# Altium PCB RX_Banda_Aerea.PcbDoc
Units mm, origin at the board's own origin, x right, y up, seen from the top; angles counter-clockwise.
Board outline 80 x 56.52 mm, 2 copper layers (Top Layer, Bottom Layer); 132 components, 71 nets, 312 pads, 9 vias.
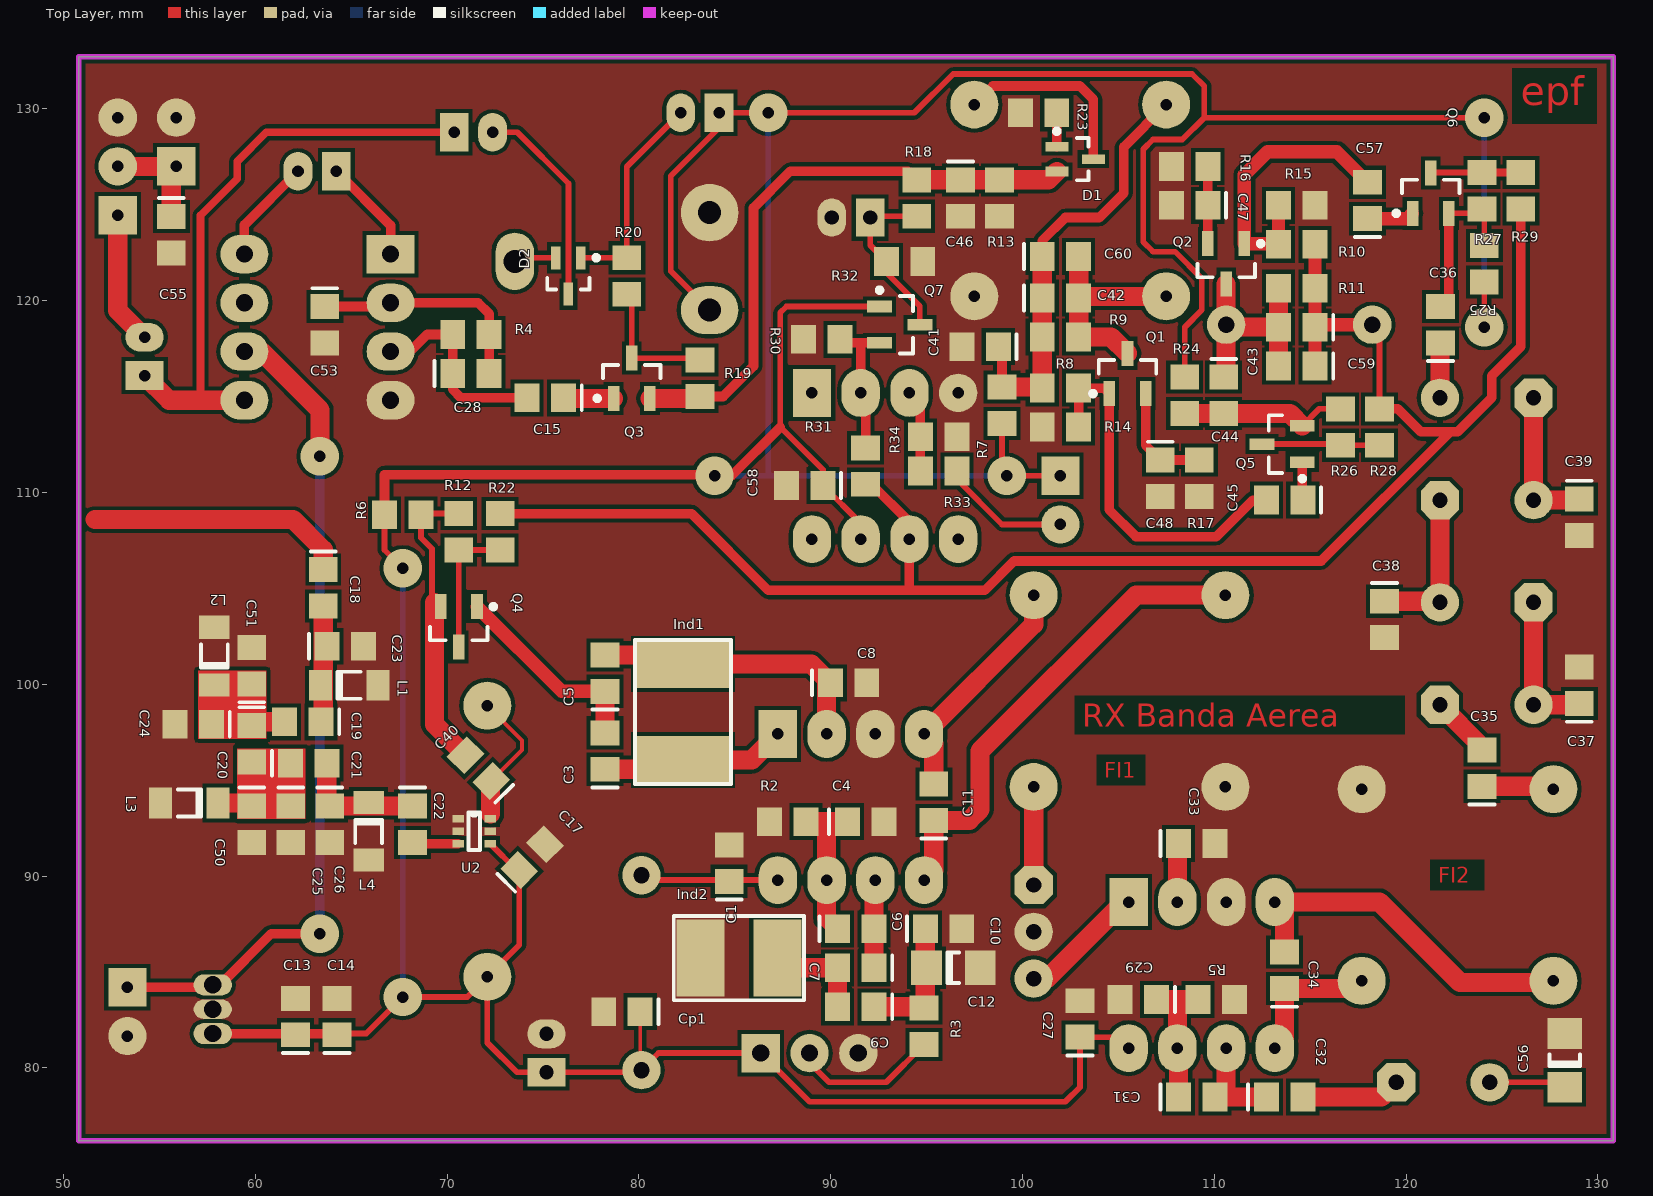
[diagram p0: Top Layer view]
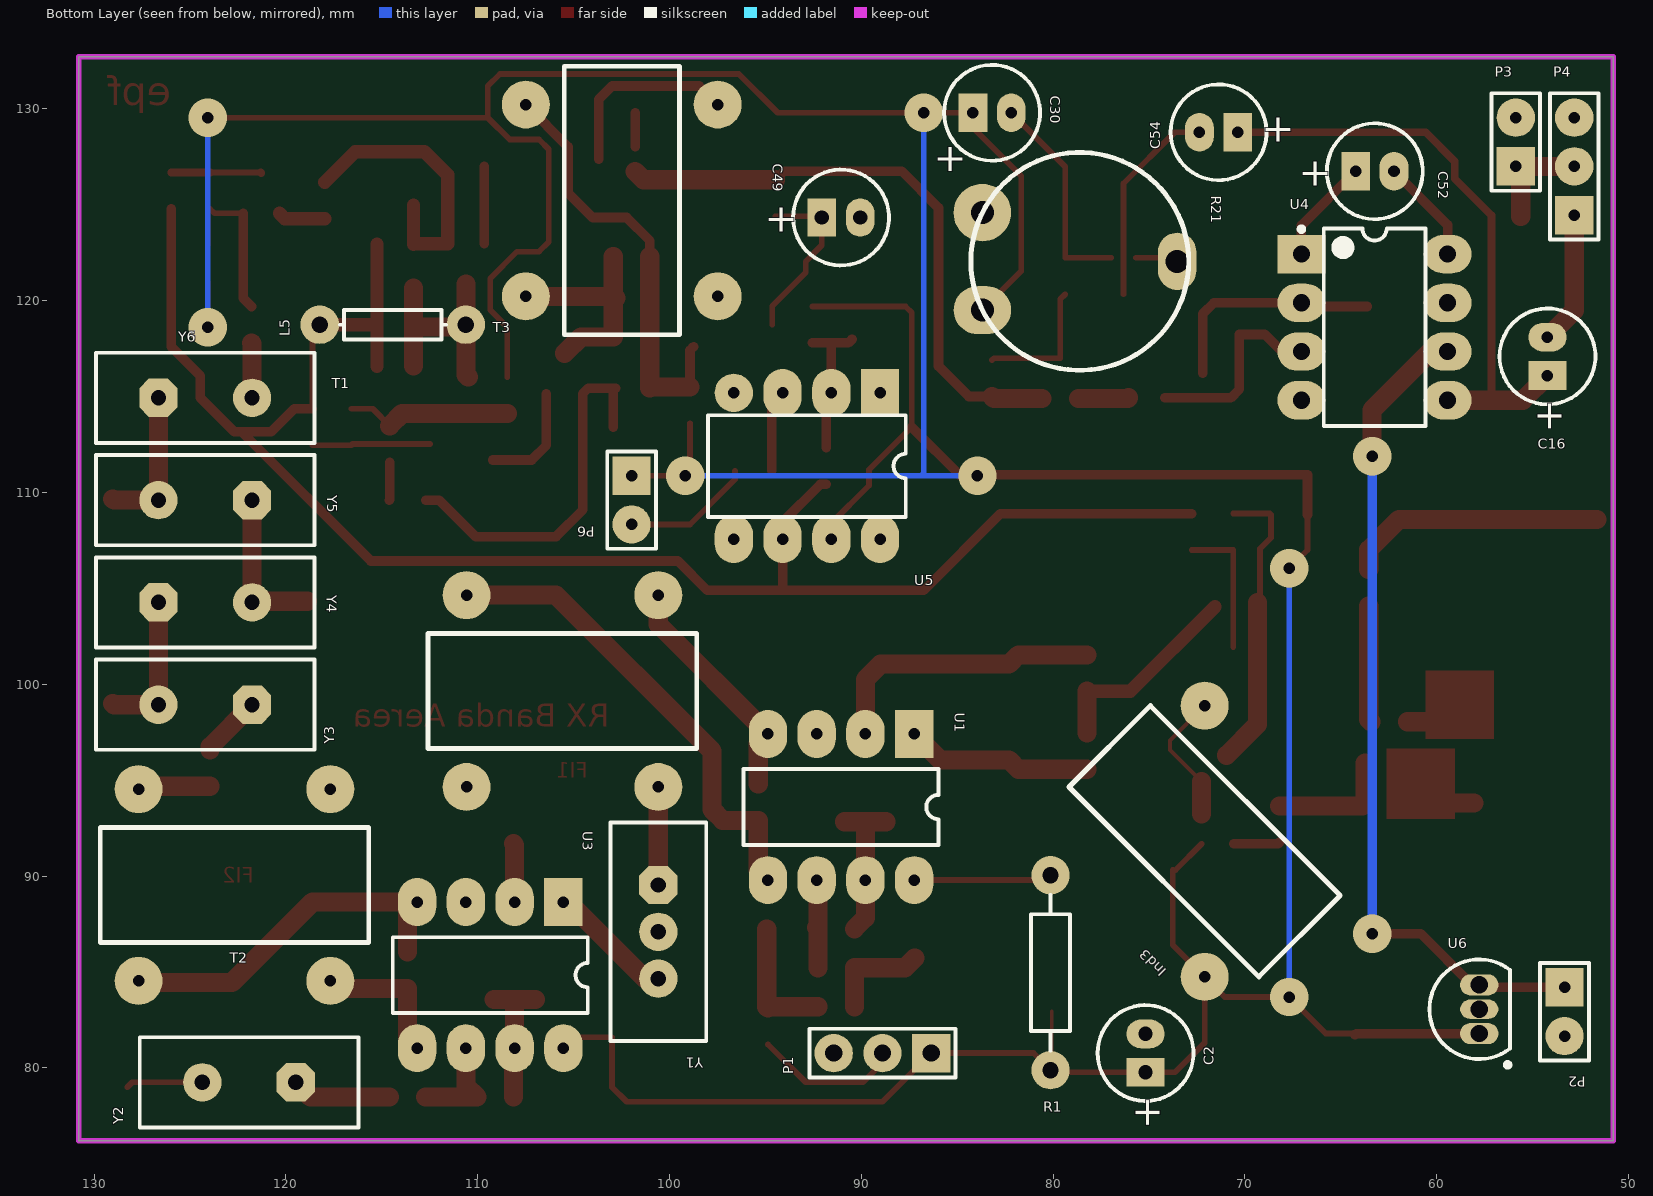
[diagram p1: Bottom Layer view, seen from below]

## Layer stack, top to bottom
Top Layer: signal copper 0.0356
Dielectric: dielectric 0.32, FR-4, Dk 4.8
Bottom Layer: signal copper 0.0356

## Board outline
50.8,76.2 130.8,76.2 130.8,132.715 50.8,132.715

## Design rules (kind name [scope] priority, off if disabled: settings)
Clearance [All] p1: gap=0.2
MinimumSolderMaskSliver [All] p1: minsoldermaskwidth=0
PolygonConnect [All] p1: connectstyle=Direct reliefconductorwidth=0.254 reliefentries=4 polygonreliefangle="90 Angle"
RoomDefinition Ampli_audio [InComponentClass('Ampli_audio')] p1: confinementstyle=ConfineIn formatcopy=TRUE lockcomponents=TRUE outline 50.8,111.506 86.741,111.506 86.741,132.08 50.8,132.08
RoomDefinition Mezclador2 [InComponentClass('Mezclador2')] p2: confinementstyle=ConfineIn formatcopy=TRUE lockcomponents=TRUE outline 133.096,127.762 88.265,127.762 88.265,74.803 133.096,74.803
RoomDefinition Mezclador1 [InComponentClass('Mezclador1')] p3: confinementstyle=ConfineIn formatcopy=TRUE lockcomponents=FALSE outline 64.643,76.708 125.984,76.708 125.984,114.427 64.643,114.427
RoomDefinition FiltroRF [InComponentClass('FiltroRF')] p4: confinementstyle=ConfineIn formatcopy=TRUE lockcomponents=TRUE outline 52.959,107.315 52.959,89.027 70.485,89.027 70.485,107.315
RoomDefinition Ampli_RF [InComponentClass('Ampli_RF')] p5: confinementstyle=ConfineIn formatcopy=TRUE lockcomponents=TRUE outline 71.653,81.915 83.058,93.32 73.449,102.929 62.044,91.524
RoomDefinition Ampli_FI2 [InComponentClass('Ampli_FI2')] p6: confinementstyle=ConfineIn formatcopy=TRUE lockcomponents=TRUE outline 128.016,133.35 83.693,133.35 83.693,96.266 128.016,96.266
RoomDefinition Alimentacion [InComponentClass('Alimentacion')] p7: confinementstyle=ConfineIn formatcopy=TRUE lockcomponents=TRUE outline 51.816,76.962 65.278,76.962 65.278,86.36 51.816,86.36
RoutingVias [All] p1: holewidth=0.6 width=2 viastyle="Through Hole" minholewidth=0.5 minwidth=1 maxholewidth=1 maxwidth=3
SilkscreenOverComponentPads [All] p1: minsilkscreentomaskgap=0
SolderMaskExpansion [All] p1: expansion=0.1
TestPointUsage [All] p1: valid=0 allowmultiple=FALSE
Testpoint [All] p1: side=15 testpointundercomponent=TRUE minsize=1.016 maxsize=2.54 preferedsize=1.524 minholesize=0 maxholesize=1.016 preferedholesize=0.813 testpointgrid=0.025 style=1023 order=0123456789
Width [All] p1: maxlimit=3 minlimit=0.2 preferedwidth=1
22 further rules are at their usual default settings.

## Classes and differential pairs
component class Mezclador2: C27 C29 C31 C32 C33 C34 C35 C36 C37 C38 C39 C56 R5 T2 U3 Y2 Y3 Y4 Y5 Y6
component class Mezclador1: C1 C2 C3 C4 C5 C6 C7 C8 C9 C10 C11 C12 C40 Cp1 Ind1 Ind2 P1 Q4 R1 R2 R3 R6 R12 R22 T1 U1 Y1
component class FiltroRF: C18 C19 C20 C21 C22 C23 C24 C25 C26 C50 C51 L1 L2 L3 L4
component class Ampli_RF: C17 Ind3 U2
component class Alimentacion: C13 C14 P2 U6
component class Ampli_audio: C15 C16 C28 C30 C52 C53 C54 C55 D2 P3 P4 Q3 R4 R19 R20 R21 U4
component class Ampli_FI2: C41 C42 C43 C44 C45 C46 C47 C48 C49 C57 C58 C59 C60 D1 L5 P6 Q1 Q2 Q5 Q6 Q7 R7 R8 R9 R10 R11 R13 R14 R15 R16 R17 R18 R23 R24 R25 R26 R27 R28 R29 R30 R31 R32 R33 R34 T3 U5

## Components (designator, comment, footprint, x,y, rotation, side; value= is the part's Value field where it differs from the comment)
C1 "Cap Pol3" C0805 84.709,90.678 r90 top
C2 "Cap Pol1" B#1 75.184,80.772 r90 bottom
C3 "Cap Pol3" C0805 78.232,96.52 r90 top
C4 "Cap Pol3" C0805 91.821,92.837 r0 top
C5 "Cap Pol3" C0805 78.232,100.584 r90 top
C6 "Cap Pol3" C0805 91.313,87.249 r0 top
C7 "Cap Pol3" C0805 91.313,85.217 r180 top
C8 "Cap Pol3" C0805 90.932,100.076 r0 top
C9 "Cap Pol3" C0805 91.313,83.185 r180 top
C10 "Cap Pol3" C0805 95.885,87.249 r0 top
C11 "Cap Pol3" C0805 95.377,93.853 r90 top
C12 "Cap Semi" C1206 96.393,85.217 r0 top
C13 "Cap Pol3" C0805 62.103,82.677 r90 top
C14 "Cap Pol3" C0805 64.262,82.677 r90 top
C15 "Cap Pol3" C0805 75.123,114.935 r180 top
C16 "Cap Pol1" B#2 54.229,117.094 r90 bottom
C17 "Cap Pol3" C0805 74.437,90.985 r45 top
C18 "Cap Pol3" C0805 63.547,105.029 r270 top
C19 "Cap Pol3" C0805 62.484,98.044 r180 top
C20 "Cap Pol3" C0805 59.817,96.901 r270 top
C21 "Cap Pol3" C0805 62.782,95.885 r0 top
C22 "Cap Pol3" C0805 68.199,92.71 r270 top
C23 "Cap Pol3" C0805 64.695,101.981 r0 top
C24 "Cap Pol3" C0805 56.769,97.917 r180 top
C25 "Cap Pol3" C0805 61.849,92.71 r270 top
C26 "Cap Pol3" C0805 63.881,92.71 r270 top
C27 "Cap Pol3" C0805 102.997,82.55 r90 top
C28 "Cap Pol3" C0805 71.247,116.205 r0 top
C29 "Cap Pol3" C0805 106.045,83.566 r180 top
C30 "Cap Pol1" B#2 83.185,129.794 r180 bottom
C31 "Cap Pol3" C0805 109.093,78.486 r0 top
C32 "Cap Pol3" C0805 113.665,78.486 r0 top
C33 "Cap Pol3" C0805 109.093,91.694 r0 top
C34 "Cap Pol3" C0805 113.665,85.09 r90 top
C35 "Cap Pol3" C0805 123.952,95.631 r90 top
C36 "Cap Pol3" C0805 121.793,118.745 r90 top
C37 "Cap Pol3" C0805 129.032,99.949 r90 top
C38 "Cap Pol3" C0805 118.872,103.378 r270 top
C39 "Cap Pol3" C0805 129.032,108.712 r270 top
C40 "Cap Pol3" C0805 71.628,95.631 r135 top
C41 "Cap Pol3" C0805 97.79,117.602 r180 top
C42 "Cap Pol3" C0805 101.981,120.142 r0 top
C43 "Cap Pol3" C0805 114.3,118.618 r180 top
C44 "Cap Pol3" C0805 110.49,115.062 r270 top
C45 "Cap Pol3" C0805 113.665,109.601 r180 top
C46 "Cap Pol3" C0805 96.774,125.349 r270 top
C47 "Cap Pol3" C0805 108.712,124.968 r180 top
C48 "Cap Pol3" C0805 107.188,110.744 r270 top
C49 "Cap Pol1" B#1 91.059,124.333 r180 bottom
C50 "Cap Pol3" C0805 59.817,92.71 r270 top
C51 "Cap Pol3" C0805 59.817,100.965 r90 top
C52 "Cap Pol1" B#2 63.23,126.746 r180 bottom
C53 "Cap Pol3" C0805 63.627,118.745 r270 top
C54 "Cap Pol1" B#2 71.374,128.778 r0 bottom
C55 "Cap Pol3" C0805 55.626,123.444 r270 top
C56 "Cap Semi" C1206 128.27,80.391 r90 top
C57 "Cap Pol3" C0805 117.983,125.222 r90 top
C58 "Cap Pol3" C0805 88.646,110.363 r180 top
C59 "Cap Pol3" C0805 114.3,116.586 r180 top
C60 "Cap Pol3" C0805 101.981,122.301 r0 top
Cp1 "Cap Pol3" C0805 79.121,82.931 r180 top
D1 "BAS70-04W" SOT323_N 102.743,127.381 r0 top
D2 "BAS70-04W" SOT323_N 76.327,121.285 r270 top
Ind1 "Ind2" Ind_5mm 82.296,98.552 r270 top
Ind2 "Ind2" Ind_4mm 85.217,85.725 r0 top
Ind3 "Ind2" NTH12_2 72.102,91.817 r45 bottom
L1 "Inductor" 3261 64.897,99.949 r0 top
L2 "Inductor" 3261 57.867,101.473 r90 top
L3 "Inductor" 3261 56.567,93.808 r180 top
L4 "Inductor" 3261 65.913,92.329 r270 top
L5 "Res1" AXIAL-0.3 114.427,118.745 r0 bottom
P1 "Header 3" HDR1X3#1 86.36,80.772 r0 bottom
P2 "Header 2" HDR1X2 53.34,84.201 r270 bottom
P3 "Header 2" HDR1X2 55.88,127 r90 bottom
P4 "Header 3" HDR1X3#2 52.832,124.46 r90 bottom
P6 "Header 2" HDR1X2 101.981,110.871 r270 bottom
Q1 "BFS17" SOT23_N 105.476,116.205 r90 top
Q2 "BFS17" SOT23_N 110.617,121.92 r270 top
Q3 "PMBF4391" SOT23_N 79.629,115.951 r90 top
Q4 "PMBF4391" SOT23_N 70.612,102.997 r270 top
Q5 "PMBF4391" SOT23_N 113.538,112.522 r180 top
Q6 "PMBF4391" SOT23_N 121.285,125.603 r90 top
Q7 "PMBF4391" SOT23_N 93.599,118.745 r0 top
R1 "Res2" AXIAL-0.4 80.137,84.963 r270 bottom
R2 "Res Semi" 2012[0805] 87.757,92.837 r0 top
R3 "Res Semi" 2012[0805] 94.869,82.169 r90 top
R4 "Res Semi" 2012[0805] 71.247,118.237 r180 top
R5 "Res Semi" 2012[0805] 110.109,83.566 r180 top
R6 "Res Semi" 2012[0805] 67.691,108.839 r180 top
R7 "Res Semi" 2012[0805] 98.933,114.554 r270 top
R8 "Res Semi" 2012[0805] 101.981,115.443 r0 top
R9 "Res Semi" 2012[0805] 101.981,118.11 r0 top
R10 "Res Semi" 2012[0805] 114.3,122.936 r0 top
R11 "Res Semi" 2012[0805] 114.3,120.65 r0 top
R12 "Res Semi" 2012[0805] 70.612,107.95 r270 top
R13 "Res Semi" 2012[0805] 98.806,125.349 r90 top
R14 "Res Semi" 2012[0805] 101.981,113.411 r180 top
R15 "Res Semi" 2012[0805] 114.3,124.968 r180 top
R16 "Res Semi" 2012[0805] 108.712,127 r0 top
R17 "Res Semi" 2012[0805] 109.22,110.744 r270 top
R18 "Res Semi" 2012[0805] 94.488,125.349 r270 top
R19 "Res Semi" 2012[0805] 83.185,115.951 r90 top
R20 "Res Semi" 2012[0805] 79.375,121.285 r90 top
R21 "Pot" Potenciometro 78.613,122.047 r270 bottom
R22 "Res Semi" 2012[0805] 72.771,107.95 r90 top
R23 "Res Semi" 2012[0805] 100.838,129.794 r0 top
R24 "Res Semi" 2012[0805] 108.458,115.062 r90 top
R25 "Res Semi" 2012[0805] 124.079,121.92 r90 top
R26 "Res Semi" 2012[0805] 116.586,113.411 r270 top
R27 "Res Semi" 2012[0805] 123.952,125.73 r90 top
R28 "Res Semi" 2012[0805] 118.618,113.411 r90 top
R29 "Res Semi" 2012[0805] 125.984,125.73 r270 top
R30 "Res Semi" 2012[0805] 89.535,117.983 r0 top
R31 "Res Semi" 2012[0805] 91.821,111.379 r270 top
R32 "Res Semi" 2012[0805] 93.853,122.047 r0 top
R33 "Res Semi" 2012[0805] 95.631,111.125 r180 top
R34 "Res Semi" 2012[0805] 95.631,112.903 r0 top
T1 "Toroide" NTH12_4 105.584,99.648 r180 bottom
T2 "Toroide" NTH12_4 122.682,89.535 r0 bottom
T3 "Toroide" NTH12_4 102.489,125.222 r90 bottom
U1 "SA602" SA602 87.249,97.409 r270 bottom
U2 "uPC2710TB" UPC2710TB2 70.575,92.982 r0 top
U3 "SA602" SA602 105.537,88.646 r270 bottom
U4 "LM386N-1" N08E 63.246,118.618 r180 bottom
U5 "TL081CP" 626-05 92.837,111.379 r0 bottom
U6 "LM78L05ACZ" Z03A 57.785,83.058 r180 bottom
Y1 "ECS-35-17-4-3IL" HC-49US 100.584,87.095 r270 bottom
Y2 "ECS-10-13-1" HC-49U 121.92,79.248 r0 bottom
Y3 "ECS-49-20-1" HC-49U 124.206,98.933 r0 bottom
Y4 "ECS-49-20-1" HC-49U 124.206,104.267 r180 bottom
Y5 "ECS-49-20-1" HC-49U 124.206,109.601 r0 bottom
Y6 "ECS-49-20-1" HC-49U 124.206,114.935 r180 bottom

## Footprints (in the part's own frame and the unit in brackets; to place one, negate y for a bottom-side part, rotate by r counter-clockwise, add the part's x,y. Pads: shape width x height; smd on the part's side, far side on the other; paste and mask are expansions set on the pad)
626-05 [mm] "DIP; 8 Leads; Row Spacing 7.62 mm; Pitch 2.54 mm"
  rect 2x2.5 hole 0.6: 1(-3.81,-3.81)
  oval 2x2.5 hole 0.6: 2(-1.27,-3.81) 3(1.27,-3.81) 5(3.81,3.81) 6(1.27,3.81) 7(-1.27,3.81) 8(-3.81,3.81)
  round 2 hole 0.6: 4(3.81,-3.81)
  silkscreen extent -5.15,-2.65 5.15,2.65
2012[0805] [mm] "Chip Resistor; Body 2.0 x 1.3 mm (LxW typ)"
  rect 1.3x1.5 smd: 1(-0.95,0) 2(0.95,0)
3261 [mm] "3216 Chip; Chip Inductor; Body 3.2 x 1.6 mm (LxW typ)"
  rect 1.2x1.6 smd: 1(-1.5,0) 2(1.5,0)
  silkscreen extent -0.6,-0.7 0.6,0.7
AXIAL-0.3 [mm] "Resistor; 2 Leads"
  round 2 hole 0.85 paste+0: 1(-3.81,0) 2(3.81,0)
  silkscreen extent -2.77,-0.76 2.77,0.76
AXIAL-0.4 [mm] "Resistor; 2 Leads"
  round 2 hole 0.85: 1(-5.08,0) 2(5.08,0)
  silkscreen extent -4.06,-1.02 4.06,1.02
B#1 [mm] "Capacitor, Electrolytic, Radial; Body 5 x 6.8 mm (Dia.xH typ); Pin Spacing 2 mm (typ)"
  rect 1.5x2 hole 0.75: 1(-1,0)
  oval 1.5x2 hole 0.75: 2(1,0)
  silkscreen extent -2.5,-2.5 2.5,2.5
B#2 [mm] "Capacitor, Electrolytic, Radial; Body 5 x 6.8 mm (Dia.xH typ); Pin Spacing 2 mm (typ)"
  rect 1.5x2 hole 0.6: 1(-1,0)
  oval 1.5x2 hole 0.6: 2(1,0)
  silkscreen extent -2.5,-2.5 2.5,2.5
C0805 [mm] "Chip Capacitor; Body 2.0 x 1.2 mm (LxW typ)"
  rect 1.3x1.5 smd: 1(-0.95,0) 2(0.95,0)
  silkscreen extent -1.9,-0.65 -1.9,0.65
C1206 [mm] "Chip Capacitor; Body 3.2 x 1.6 mm (LxW typ)"
  rect 1.6x1.8 smd: 1(-1.4,0) 2(1.4,0)
  silkscreen extent -0.3,-0.8 0.3,0.8
HC-49U [mm] "Quartz Crystal, Thru-Hole; 2 Leads; Body 11.35 x 4.65 x 13.46 mm (LxWxH max)"
  oct 2x2 hole 0.8 paste+0: 1(-2.44,0)
  round 2 hole 0.8 paste+0: 2(2.44,0)
  silkscreen extent -5.7,-2.35 5.7,2.35
HC-49US [mm] "Quartz Crystal, Thru-Hole; 3 Leads; Body 11.35 x 5 x 3.5 mm (LxWxH max)"
  oct 2x2 hole 0.8 paste+0: 1(-2.44,0)
  round 2 hole 0.8 paste+0: 2(0,0) 3(2.44,0)
  silkscreen extent -5.7,-2.5 5.7,2.5
HDR1X2 [mm] "Connector; Header; 2 Position"
  rect 2x2 hole 0.6: 1(0,0)
  round 2 hole 0.6: 2(2.54,0)
  silkscreen extent -1.27,-1.27 3.81,1.27
HDR1X3#1 [mm] "Connector; Header; 3 Position"
  rect 2x2 hole 0.9 paste+0: 1(0,0)
  round 2 hole 0.9 paste+0: 2(2.54,0) 3(5.08,0)
  silkscreen extent -1.27,-1.27 6.35,1.27
HDR1X3#2 [mm] "Connector; Header; 3 Position"
  rect 2x2 hole 0.6: 1(0,0)
  round 2 hole 0.6: 2(2.54,0) 3(5.08,0)
  silkscreen extent -1.27,-1.27 6.35,1.27
Ind_4mm [mm]
  rect 2.5x4 smd: 1(-2,0) 2(2,0)
  silkscreen extent -3.4,-2.2 3.4,2.2
Ind_5mm [mm]
  rect 2.5x5 smd: 1(-2.5,0) 2(2.5,0)
  silkscreen extent -3.75,-2.5 3.75,2.5
N08E [mm] "DIP, 8-Leads, Row Spacing 7.62mm, Pitch 2.54mm, Body 9.91x6.35mm"
  rect 2.5x2 hole 0.9: 1(-3.81,3.81)
  oval 2.5x2 hole 0.9: 2(-3.81,1.27) 3(-3.81,-1.27) 4(-3.81,-3.81) 5(3.81,-3.81) 6(3.81,-1.27) 7(3.81,1.27) 8(3.81,3.81)
  silkscreen extent -3.94,-5.15 2.65,5.23, body extent -3.6,-5.15 3.6,5.15, height 5.34
NTH12_2 [mm]
  round 2.5 hole 0.6: 1(-5,5) 2(5,-5)
  silkscreen extent -7,-3 7,3
NTH12_4 [mm]
  round 2.5 hole 0.6: 1(-5,5) 2(5,5) 3(-5,-5) 4(5,-5)
  silkscreen extent -7,-3 7,3
Potenciometro [mm]
  round 3 hole 1.2: 1(-2.54,-5.08)
  oval 2.5x3 hole 1.2: 2(2.54,-5.08)
  oval 3x2 hole 1.2: 3(0,5.08)
  silkscreen extent -5.68,-5.68 5.68,5.68
SA602 [mm]
  rect 2.5x2 hole 0.6: 1(0,0)
  oval 2.5x2 hole 0.6: 2(0,-2.54) 3(0,-5.08) 4(0,-7.62) 5(7.62,-7.62) 6(7.62,-5.08) 7(7.62,-2.54) 8(7.62,0)
  silkscreen extent 1.84,-8.89 5.78,1.27
SOT23_N [mm] "SOT23, 3-Leads, Body 2.9x1.3mm, Pitch 0.95mm, Lead Span 2.3mm, IPC Medium Density"
  rect 1.3x0.6 smd: 1(-1.05,0.95) 2(-1.05,-0.95) 3(1.05,0)
  silkscreen extent -1.17,-1.5 0.7,1.92, body extent -0.7,-1.5 0.7,1.5, height 1.1
SOT323_N [mm] "SOT323, 3-Leads, Body 2.0x1.3mm, Pitch 0.65mm, Lead Span 2.1mm, IPC Medium Density"
  rect 1.2x0.5 smd: 1(-0.95,0.65) 2(-0.95,-0.65) 3(0.95,0)
  silkscreen extent -1.07,-1.1 0.7,1.57, body extent -0.7,-1.1 0.7,1.1, height 1.1
UPC2710TB2 [mm]
  rect 0.6x0.4 smd: 1(0,-1.3) 2(0,-0.65) 3(0,0) 4(1.675,0) 5(1.675,-0.65) 6(1.675,-1.3)
  silkscreen extent 0.54,-1.63 1.13,0.33
Z03A [mm] "TO, Flat Index; 3 In-Line, Axial Leads; Body Dia. 5mm; Leads 0.55 x 0.50 mm (max)"
  oval 2x1.1 hole 0.9: 1(0,-1.27) 3(0,1.27)
  oval 2x1 hole 0.9: 2(0,0)
  silkscreen extent -2.6,-3.02 1.6,2.6, body extent -2.61,-2.61 1.6,2.61, height 5.2

## Part data
C1 C3 C4 C5 C6 C7 C8 C9 C10 C11 C13 C14 C15 C17 C18 C19 C20 C21 C22 C23 C24 C25 C26 C27 C28 C29 C31 C32 C33 C34 C35 C36 C37 C38 C39 C40 C41 C42 C43 C44 C45 C46 C47 C48 C50 C51 C53 C55 C57 C58 C59 C60 Cp1: "Polarized Capacitor (Surface Mount)"
C2 C16 C30 C49 C52 C54: "Polarized Capacitor (Radial)"
C12 C56: "Capacitor (Semiconductor SIM Model)"
D1: library part 1PS70SB15, "Schottky Barrier Double Diode"
D2: library part BAS40-04W, "Schottky Barrier Double Diode"
L5 R1: "Resistor"
P1 P4: "Header, 3-Pin"
P2 P3 P6: "Header, 2-Pin"
Q1 Q2: "NPN 1 GHz Wideband Transistor"
Q3 Q4 Q5 Q6 Q7: "N-channel Silicon Junction Field-effect Transistor"
R2 R3 R4 R5 R6 R7 R8 R9 R10 R11 R12 R13 R14 R15 R16 R17 R18 R19 R20 R22 R23 R24 R25 R26 R27 R28 R29 R30 R31 R32 R33 R34: "Semiconductor Resistor"
T1 T2 T3: library part Transformador_Toroide
U1 U3: library part SA602A
U4: "Low Voltage Audio Power Amplifier"
U5: "JFET-Input Operational Amplifier"
U6: "3-Terminal Positive Regulators"
Y1: "Crystal Oscillator, 3rd In-Line Lead Version"
Y2 Y3 Y4 Y5 Y6: "Crystal Oscillator"

## Via types
v1: diameter 2, hole 0.6, Top Layer to Bottom Layer, 9 vias

## Nets (pads, with @x,y where several pads share a name; then routed paths per layer and width w, separated by ;. In a path a pad name is that pad's centre, name@x,y a point inside that pad or via, vN(x,y) a via of type N, cw(c..) or ccw(c..) an arc to the next point about the centre after c; other vN are vias at no path point)
AUDIO: C46.1 D1.2 Q3.2 R13.2 R18.1 R19.1 | length 31.3
  Top Layer w0.5: R19.1 84.394,115.001 85.979,116.586 85.979,124.841 87.884,126.746 94.041,126.746 R18.1
  Top Layer w1: Q3.2 83.085,114.901 R19.1 ; R18.1 C46.1 R13.2 101.361,126.299 D1.2
AVCC: P2.1 U4.6 U6.3 | length 43.7
  Top Layer w0.5: P2.1 57.658,84.201 U6.3 58.166,84.328 60.833,86.995 v1(63.373,86.995)
  Top Layer w1: U4.6 60.325,117.348 63.373,114.3 v1(63.373,111.887)
  Bottom Layer w0.5: v1(63.373,86.995) v1(63.373,111.887)
CAG: C43.1 C59.1 L5.2 R10.2 R11.2 R22.2 R28.2 R29.2 R31.2 U5.6 | length 92.7
  Top Layer w0.3: L5.2 118.618,118.364 R28.2
  Top Layer w0.5: R22.2 82.743,108.9 86.741,104.902 94.107,104.902 ; R31.2 92.136,110.429 94.107,108.458 U5.6 94.107,104.902 ; R28.2 119.573,114.361 120.777,113.157 122.301,113.157 ; R29.2 125.984,117.602 124.46,116.078 124.46,114.935 122.682,113.157 122.301,113.157 ; 94.107,104.902 98.044,104.902 99.568,106.426 115.57,106.426 122.301,113.157
  Top Layer w0.7: C59.1 C43.1 ; R10.2 C43.1 ; L5.2 115.377,118.745 C43.1
FI1: U3.1 Y1.3 | length 6.6
  Top Layer w1: Y1.3 101.292,84.655 105.283,88.646 U3.1
FI2: C36.2 Q6.2 R25.2 R27.1 | length 8.8
  Top Layer w0.3: Q6.2 123.725,124.553 R27.1 124.079,124.653 R25.2
  Top Layer w0.5: C36.2 122.235,120.137 Q6.2
GND: C1.2 C2.2 C4.2 C8.2 C10.2 C12.2 C13.2 C14.2 C17.2 C23.2 C24.2 C25.2 C26.2 C27.2 C29.2 C33.2 C37.2 C38.2 C39.2 C41.2 C46.2 C47.2 C48.2 C49.2 C50.2 C51.2 C53.2 C55.2 C56.2 C58.2 Cp1.2 Ind2.1 L1.2 L2.2 L3.2 L4.2 P1.3 P2.2 P3.2 P4.3 R2.1 R5.1 R13.1 R14.2 R15.1 R16.1 R17.2 R21.1 R23.1 R30.1 R32.2 R34.2 T1.3 T2.3 T3.3 U1.3 U2.2 U2.3 U2.5 U3.3 U4.4 U5.4 U6.2 Y1.2
NetC1_1: C1.1 R1.1 U1.8 | length 7.2
  Top Layer w0.3: R1.1 80.391,89.789 U1.8
NetC3_1: C3.1 Ind1.2 U1.1 | length 9.8
  Top Layer w1: C3.1 81.814,95.57 Ind1.2 85.892,96.052 U1.1
NetC3_2: C3.2 C5.1 Q4.1 | length 10.7
  Top Layer w0.7: Q4.1 75.975,99.634 C5.1
  Top Layer w1: C3.2 C5.1
NetC4_1: C4.1 C6.1 R2.2 U1.7 | length 8
  Top Layer w1: R2.2 89.789,92.837 ; C6.1 89.789,87.823 U1.7 89.789,92.837 ; C4.1 89.789,92.837
NetC5_2: C5.2 C8.1 Ind1.1 U1.2 | length 14.9
  Top Layer w1: C5.2 81.814,101.534 Ind1.1 88.987,101.052 89.789,100.25 U1.2
NetC6_2: C6.2 C7.1 U1.6 | length 4.7
  Top Layer w1: C7.1 C6.2 ; C6.2@92.329,87.315 C6.2 ; U1.6 92.263,89.723 C6.2
NetC7_2: C7.2 C9.2 Ind2.2 | length 5.4
  Top Layer w1: Ind2.2 87.725,85.217 C7.2 C9.2
NetC9_1: C9.1 C10.1 C12.1 R3.2 | length 6.8
  Top Layer w1: C9.1 94.803,83.185 R3.2 94.935,83.185 C10.1
NetC11_1: C11.1 T1.1 U1.5 | length 25.2
  Top Layer w1: U1.5 95.377,90.297 C11.1 97.221,92.903 97.79,93.472 97.79,96.52 105.918,104.648 T1.1
NetC11_2: C11.2 T1.2 U1.4 | length 12.4
  Top Layer w1: C11.2 95.377,96.901 U1.4 100.584,103.124 T1.2
NetC15_1: C15.1 Q3.1 | length 2.6
  Top Layer w1: C15.1 76.107,114.901 Q3.1
NetC15_2: C15.2 C28.1 R4.2 U4.3 | length 10.5
  Top Layer w0.5: U4.3 68.072,117.348 68.961,118.237 R4.2 C28.1 70.297,115.377 70.739,114.935 C15.2
NetC16_1: C16.1 C54.1 U4.5 | length 30.9
  Top Layer w0.4: 57.15,114.808 57.15,124.46 59.055,126.365 59.055,127.254 60.579,128.778 C54.1
  Top Layer w1: C16.1 55.515,114.808 57.15,114.808 U4.5
NetC16_2: C16.2 P4.1 | length 6.9
  Top Layer w1: P4.1 52.832,119.491 C16.2
NetC18_2: C18.2 C19.1 C23.1 L1.1 | length 6.1
  Top Layer w1: C19.1 63.547,98.157 C18.2
NetC19_2: C19.2 C20.1 C24.1 C51.1 L2.1 | length 1.8
  Top Layer w1: C20.1 60.01,98.044 C19.2
NetC20_2: C20.2 C21.1 C25.1 C50.1 L3.1 | length 1.8
  Top Layer w1: L3.1 59.669,93.808 C50.1
NetC21_2: C21.2 C22.1 C26.1 L4.1 | length 6.6
  Top Layer w1: C21.2 63.732,93.809 C26.1 C22.1
NetC28_2: C28.2 C53.1 R4.1 U4.2 | length 12
  Top Layer w0.5: C53.1 66.863,119.695 U4.2 71.628,119.888 72.197,119.319 R4.1 C28.2
NetC29_1: C29.1 C31.1 R5.2 U3.7 | length 7.3
  Top Layer w1: C29.1 108.077,83.566 ; C31.1 108.143,80.96 U3.7 108.077,83.566 ; R5.2 108.077,83.566
NetC30_2: C30.2 D2.1 R20.2 | length 11.1
  Top Layer w0.3: D2.1 R20.2 79.375,126.984 C30.2
NetC31_2: C31.2 C32.1 U3.6 | length 5.4
  Top Layer w1: U3.6 110.617,79.06 C31.2 C32.1
NetC32_2: C32.2 Y2.1 | length 5.2
  Top Layer w1: C32.2 118.718,78.486 Y2.1
NetC33_1: C33.1 U3.2 | length 3.1
  Top Layer w1: U3.2 108.077,91.628 C33.1
NetC34_1: C34.1 T2.1 U3.5 | length 7.5
  Top Layer w1: U3.5 113.665,81.534 C34.1 117.287,84.14 T2.1
NetC34_2: C34.2 T2.2 U3.4 | length 19.1
  Top Layer w1: C34.2 113.665,88.138 U3.4 118.618,88.646 122.809,84.455 127.602,84.455 T2.2
NetC35_1: C35.1 T2.4 | length 3.8
  Top Layer w1: C35.1 127.536,94.681 T2.4
NetC35_2: C35.2 Y3.1 | length 3.3
  Top Layer w1: Y3.1 123.952,96.747 C35.2
NetC36_1: C36.1 Y6.2 | length 2.9
  Top Layer w1: Y6.2 121.766,117.768 C36.1
NetC37_1: C37.1 Y3.2 Y4.1 | length 7.7
  Top Layer w1: Y4.1 Y3.2 128.966,98.933 C37.1
NetC38_1: C38.1 Y4.2 Y5.1 | length 8.2
  Top Layer w1: C38.1 Y4.2@121.705,104.328 ; Y4.2 Y4.2@121.705,104.328 ; Y5.1 121.766,104.389 Y4.2@121.705,104.328
NetC39_1: C39.1 Y5.2 Y6.1 | length 7.7
  Top Layer w1: Y6.1 Y5.2 128.971,109.601 C39.1
NetC40_2: C40.2 Q4.2 R6.1 R12.1 | length 15.5
  Top Layer w0.3: 69.342,104.267 69.215,104.394 69.215,107.061 68.641,107.635 R6.1 68.702,108.9 R12.1
  Top Layer w1: 69.342,104.267 69.342,97.917 C40.2
NetC41_1: C41.1 C42.1 C60.1 R7.1 R8.1 R9.1 T3.2 | length 22.9
  Top Layer w0.3: R8.1@100.843,115.504 R8.1@100.904,115.443
  Top Layer w0.5: C41.1 98.933,117.409 R7.1 ; C60.1 101.031,123.129 102.235,124.333 104.013,124.333 105.283,125.603 105.283,128.016 T3.2
  Top Layer w1: R7.1 100.97,115.504 R8.1 C60.1
NetC42_2: C42.2 C60.2 Q1.3 R9.2 T3.1 | length 11.8
  Top Layer w1: C42.2@102.804,120.142 102.884,120.222 T3.1 ; C60.2 C42.2 R9.2 104.621,118.11 Q1.3
NetC43_2: C43.2 C44.1 C59.2 L5.1 Q2.3 R11.1 | length 11.8
  Top Layer w1: C44.1 110.617,116.139 L5.1 ; Q2.3 L5.1 ; C59.2 C43.2 ; R11.1 C43.2 ; L5.1 110.744,118.618 C43.2
NetC44_2: C44.2 Q5.2 R24.1 R26.1 | length 8.8
  Top Layer w0.3: Q5.2 115.477,114.361 R26.1
  Top Layer w1: R24.1 C44.2 113.948,114.112 Q5.2
NetC45_1: C45.1 Q5.1 | length 2
  Top Layer w0.5: Q5.1 114.588,109.628 C45.1
NetC45_2: C45.2 Q1.1 R8.2 R14.1 | length 19.5
  Top Layer w0.5: R14.1 102.931,115.316 102.804,115.443 R8.2 104.238,115.443 Q1.1 104.526,109.088 105.918,107.696 110.109,107.696 112.014,109.601 C45.2
NetC47_1: C47.1 Q2.2 R16.2 | length 4
  Top Layer w0.5: R16.2 109.667,126.995 Q2.2
NetC48_1: C48.1 Q1.2 R17.1 | length 5.8
  Top Layer w0.5: Q1.2 106.426,112.456 C48.1 R17.1
NetC49_1: C49.1 Q7.3 R18.2 R32.1 | length 9.1
  Top Layer w0.3: R18.2 92.125,124.399 C49.1 92.059,122.891 R32.1 92.903,121.473 94.649,119.727 Q7.3
NetC52_1: C52.1 U4.1 | length 5.5
  Top Layer w0.5: C52.1 67.056,123.92 U4.1
NetC52_2: C52.2 U4.8 | length 5.5
  Top Layer w0.5: U4.8 59.436,123.952 C52.2
NetC54_2: C54.2 D2.3 | length 10.8
  Top Layer w0.3: C54.2 73.66,128.778 76.327,126.111 D2.3
NetC55_1: C55.1 P3.1 P4.2 | length 5.8
  Top Layer w1: P4.2 P3.1 55.626,126.746 C55.1
NetC56_1: C56.1 Y2.2 | length 4
  Top Layer w0.3: Y2.2 128.013,79.248 C56.1
NetC57_1: C57.1 Q6.1 | length 2.5
  Top Layer w0.7: C57.1 120.054,124.272 Q6.1
NetC57_2: C57.2 Q2.1 R10.1 R15.2 | length 15
  Top Layer w0.7: R15.2 R10.1 113.316,122.97 Q2.1 111.567,126.553 112.776,127.762 116.393,127.762 C57.2
NetD1_1: D1.1 R23.2 | length 1.8
  Top Layer w0.5: R23.2 101.788,128.036 D1.1
NetD1_3: D1.3 T3.4 | length 10
  Top Layer w0.5: T3.4 98.458,131.191 102.997,131.191 103.693,130.495 D1.3
NetD2_2: D2.2 R21.3 | length 2.2
  Top Layer w0.3: R21.3 73.721,122.235 D2.2
NetP1_2: P1.2 R3.1 | length 7.7
  Top Layer w0.3: P1.2 88.9,80.264 89.916,79.248 92.898,79.248 R3.1
NetP6_2: P6.2 R33.1 | length 6.8
  Top Layer w0.3: R33.1 96.581,110.683 98.933,108.331 P6.2
NetQ3_3: Q3.3 R19.2 R20.1 | length 7
  Top Layer w0.3: R20.1 79.629,120.081 Q3.3 83.085,117.001 R19.2
NetQ4_3: Q4.3 R12.2 R22.1 | length 7.2
  Top Layer w0.3: Q4.3 R12.2 R22.1
NetQ5_3: Q5.3 R26.2 R28.1 | length 6.2
  Top Layer w0.3: Q5.3 116.525,112.522 R26.2 R28.1
NetQ6_3: Q6.3 R27.2 R29.1 | length 4.7
  Top Layer w0.3: Q6.3@121.312,126.68 R27.2
  Top Layer w0.4: Q6.3 Q6.3@121.312,126.68 ; R27.2 R29.1
NetQ7_2: Q7.2 R30.2 R31.1 U5.2 | length 7.7
  Top Layer w0.5: R30.2 90.673,117.795 91.567,117.795 ; R31.1 91.821,114.935 U5.2 91.567,117.795 ; Q7.2 91.567,117.795
NetR33_2: R33.2 R34.1 U5.3 | length 4.3
  Top Layer w0.5: U5.3 94.681,114.615 R34.1 R33.2
NetT1_4: T1.4 Y1.1 | length 5.1
  Top Layer w1: Y1.1 T1.4
RF_AMP: C40.1 Ind3.2 U2.4 | length 7.1
  Top Layer w0.2: Ind3.2 73.914,97.076 73.914,96.573 C40.1 C40.1@72.263,94.922
  Top Layer w1: 72.263,93.232 C40.1@72.263,94.922
RF_FILT: C22.2 U2.1 | length 2.4
  Top Layer w0.5: C22.2 68.277,91.682 U2.1
RF_IN: C18.1 | length 13.6
  Top Layer w1: 51.65,108.585 61.976,108.585 63.547,107.014 C18.1
VCC: C2.1 C13.1 C14.1 C17.1 C27.1 C30.1 C58.1 Cp1.1 Ind3.1 P1.1 P6.1 Q7.1 R1.2 R6.2 R7.2 R21.2 R24.2 R25.1 U2.6 U3.8 U5.7 U6.1 | length 263.4
  Top Layer w0.2: C17.1@73.619,90.313 C17.1 ; Cp1.1 80.071,79.949 R1.2
  Top Layer w0.3: C14.1@64.201,81.788 65.786,81.788 v1(67.691,83.693) 71.05,83.693 Ind3.1 ; R6.2 66.741,106.995 v1(67.691,106.045) ; U2.6 C17.1@73.619,90.313 ; C17.1 73.765,86.409 Ind3.1 ; R21.2 81.661,121.539 81.661,126.492 84.185,129.016 C30.1 v1(86.741,129.794) 94.361,129.794 96.389,131.822 108.843,131.822 109.474,131.191 109.474,129.54 ; U5.7 91.567,108.392 C58.1 89.596,111.186 87.376,113.406 87.376,119.38 87.691,119.695 Q7.1 ; R7.2 98.933,111.125 v1(99.187,110.871) P6.1 ; U3.8 104.963,81.6 C27.1 102.997,78.994 102.235,78.232 88.9,78.232 P1.1 81.026,80.772 R1.2 80.026,79.772 C2.1 73.644,79.772 72.102,81.314 Ind3.1 ; R24.2 108.458,118.618 109.347,119.507 109.347,121.158 107.95,122.555 106.807,122.555 106.299,123.063 106.299,127.889 106.807,128.397 108.331,128.397 109.474,129.54 ; v1(124.079,118.618) R25.1 ; v1(124.079,129.54) 109.474,129.54
  Top Layer w0.5: U6.1 64.201,81.788 C14.1 ; R6.2 66.741,110.932 v1@84.008,110.932 ; v1(83.947,110.871) 84.841,110.871 87.376,113.406
  Bottom Layer w0.3: v1(67.691,83.693) v1(67.691,106.045) ; v1(83.947,110.871) 86.868,110.871 ; v1(86.741,129.794) 86.741,110.998 86.868,110.871 ; v1(99.187,110.871) 86.868,110.871 ; v1(124.079,118.618) v1(124.079,129.54)
pads on no net: U4.7 U5.1 U5.5 U5.8

## Polygon pours and split planes (outlines as drawn)
GND on Top Layer "Top Layer-GND" (solid, remove dead copper, pour order 1000): 50.292,133.858 50.292,74.803 49.657,74.168 49.784,74.041 133.731,74.041 133.731,132.08 131.572,134.239

## Keep-outs
Keep-Out Layer:
  the board outline again, w0.3

## Other copper
Top Layer:
  region net NetC20_2: 59.055,96.647 59.055,92.964 62.611,92.964 62.611,96.647
  region net NetC19_2: 57.023,100.711 57.023,97.155 60.579,97.155 60.579,100.711
  text "epf" at 125.984,130.175 h1.5
  text "RX Banda Aerea" at 103.124,97.79 h1.2
  text "FI1" at 104.267,95.123 h0.8
  text "FI2" at 121.666,89.662 h0.8

## Silkscreen, mask and mechanical layers (free items; w line width, h text height)
Drill Drawing:
  text ".LEGEND" at 135.88,81.28 h1.52
  text "Drill Drawing." at 135.88,78.74 h1.52

## Dimensions
50.8,76.2 to 50.8,132.715 on Mechanical 1
50.8,76.2 to 130.8,76.2 on Mechanical 1

## Text inside footprints (layer, text, board x,y; h text height)
C2: Bottom Overlay "+" at 74.434,76.797 h1.5 r270
C16: Bottom Overlay "+" at 53.479,113.119 h1.5 r270
C30: Bottom Overlay "+" at 86.233,126.746 h1.5
C49: Bottom Overlay "+" at 95.034,123.583 h1.5
C52: Bottom Overlay "+" at 67.205,125.996 h1.5
C54: Bottom Overlay "+" at 67.399,129.528 h1.5 r180